# Altium PCB encoder.PcbDoc
Units mm, origin at the board's own origin, x right, y up, seen from the top; angles counter-clockwise.
Board outline 44.68 x 18.3 mm, 2 copper layers (Top Layer, Bottom Layer); 2 components, 4 nets, 12 pads, 24 vias.
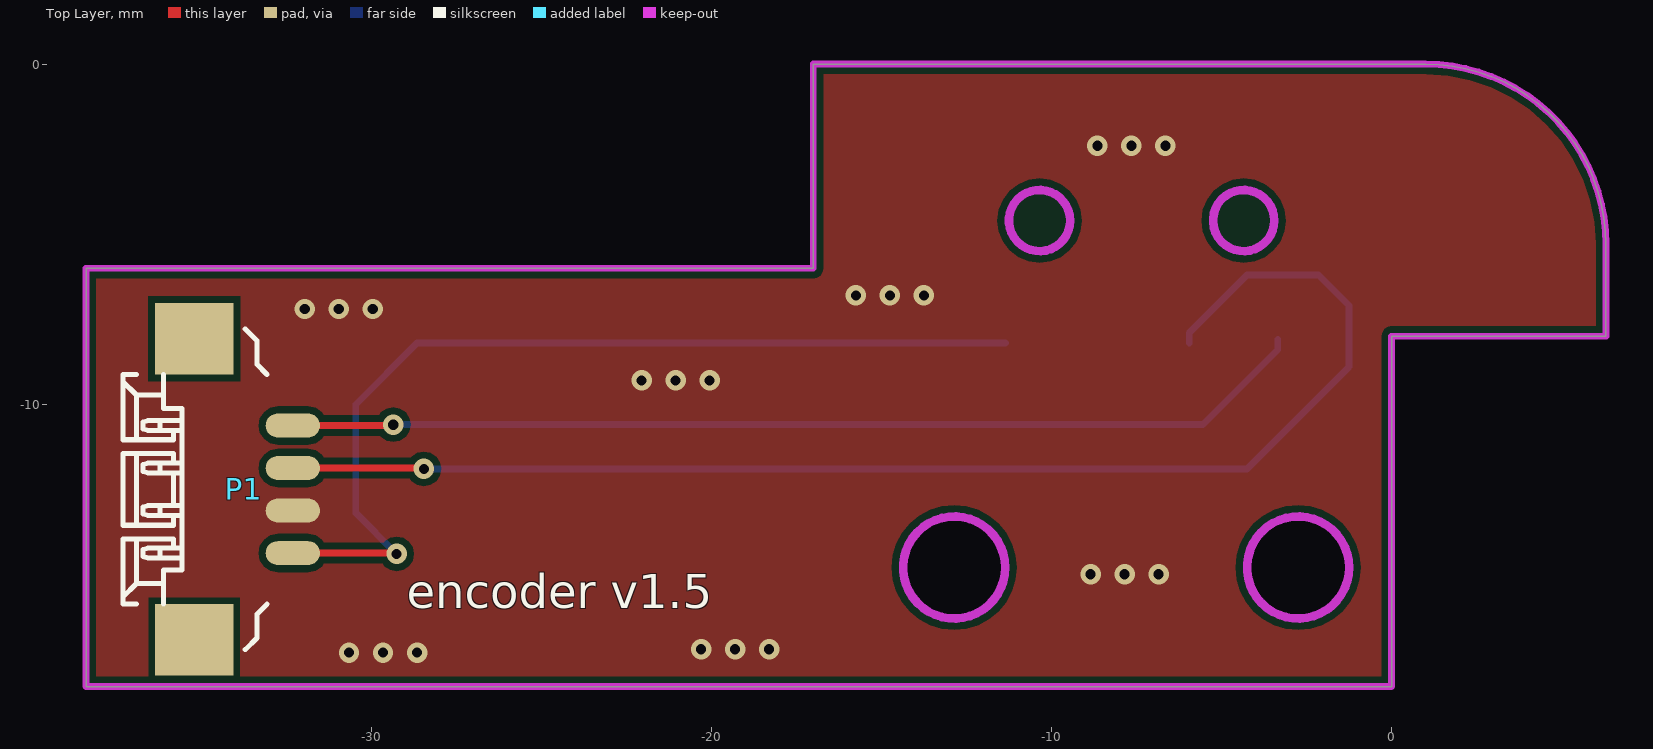
[diagram p0: Top Layer view]
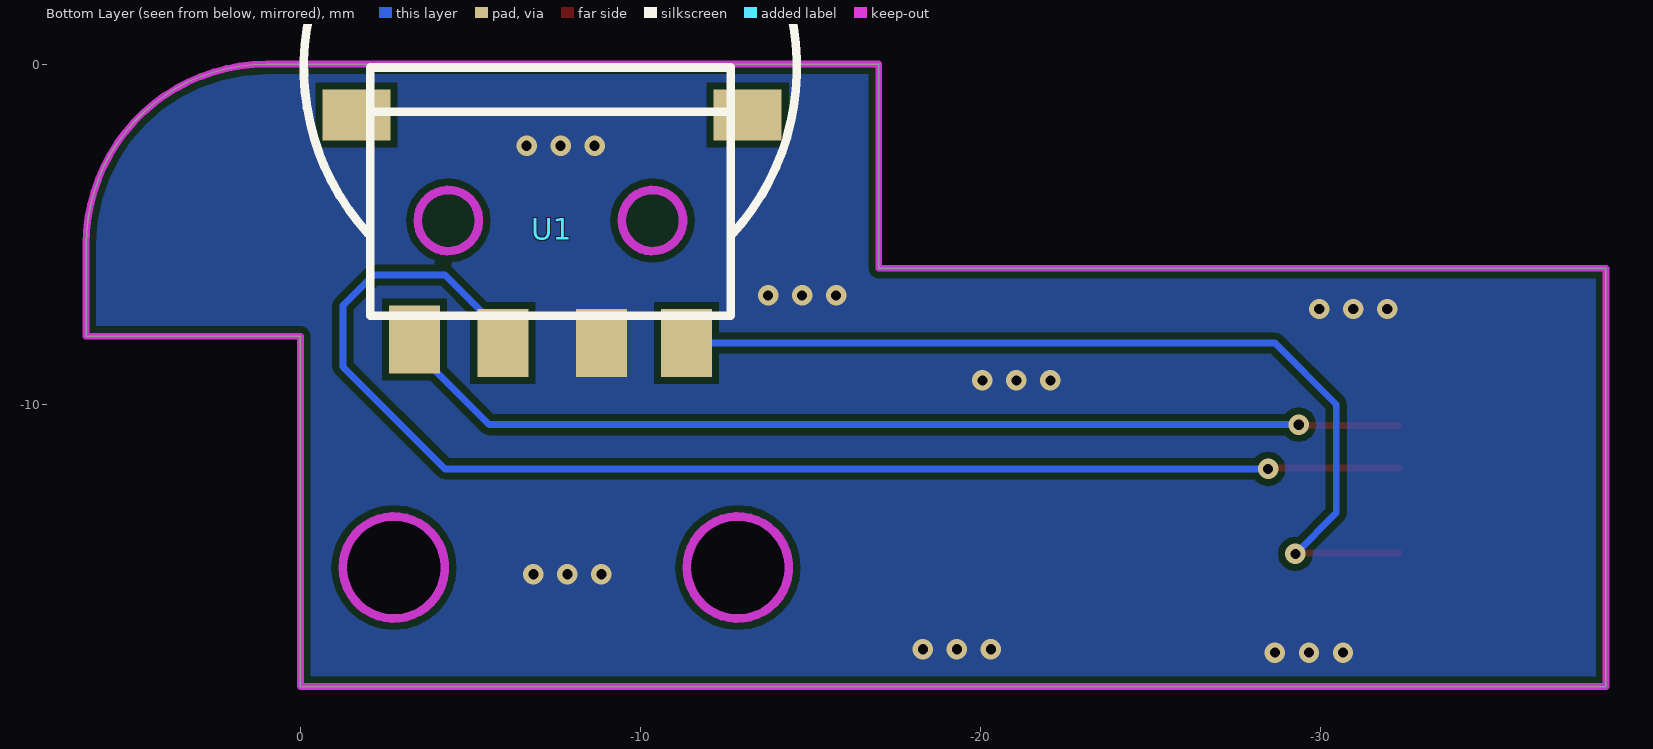
[diagram p1: Bottom Layer view, seen from below]

## Layer stack, top to bottom
Top Layer: signal copper 0.0356
Dielectric: dielectric 0.32, FR-4, Dk 4.8
Bottom Layer: signal copper 0.0356

## Board outline
-38.38,-18.3 -38.38,-6 -17,-6 -17,0 1,0 cw(c1,-5.3) 6.3,-5.3 6.3,-8 0,-8 0,-18.3
cut-out: -14.36,-14.8 ccw(c-12.86,-14.8) -12.86,-16.3 ccw(c-12.86,-14.8) -11.36,-14.8 ccw(c-12.86,-14.8) -12.86,-13.3 ccw(c-12.86,-14.8)
cut-out: -4.25,-14.8 ccw(c-2.75,-14.8) -2.75,-16.3 ccw(c-2.75,-14.8) -1.25,-14.8 ccw(c-2.75,-14.8) -2.75,-13.3 ccw(c-2.75,-14.8)

## Design rules (kind name [scope] priority, off if disabled: settings)
Clearance [All] p1: gap=0.2
ComponentClearance [All] p1 off: gap=0.254 collisioncheckmode=3 verticalgap=0.254 showdistances=FALSE
PolygonConnect [All] p1: connectstyle=Direct reliefconductorwidth=0.254 reliefentries=4 polygonreliefangle="90 Angle"
RoutingVias [All] p1: holewidth=0.3 width=0.6 viastyle="Through Hole" minholewidth=0.3 minwidth=0.6 maxholewidth=0.3 maxwidth=0.6
SilkscreenOverComponentPads [All] p1: minsilkscreentomaskgap=0.254
SolderMaskExpansion [All] p1: expansion=0.102
Width [All] p1: maxlimit=3 minlimit=0.2 preferedwidth=0.2
26 further rules are at their usual default settings.

## Components (designator, comment, footprint, x,y, rotation, side; value= is the part's Value field where it differs from the comment)
P1 "" "MX1.25-4P 卧" -33.75,-12.5 r90 top
U1 "SIQ-02FVS3滚轮编码器" 美上美SIQ-02FVS3滚轮编码器 -7.35,-0.1 r180 bottom

## Footprints (in the part's own frame and the unit in brackets; to place one, negate y for a bottom-side part, rotate by r counter-clockwise, add the part's x,y. Pads: shape width x height; smd on the part's side, far side on the other; paste and mask are expansions set on the pad)
"MX1.25-4P 卧" [mm]
  rect 2.1x2.3 smd: 0(-4.425,1.45) 0(4.425,1.45)
  oval 0.7x1.6 smd: 1(1.875,-1.45) 2(0.625,-1.45) 3(-0.625,-1.45) 4(-1.875,-1.45)
  silkscreen extent -4.71,-0.69 4.71,3.55
美上美SIQ-02FVS3滚轮编码器 [mm]
  rect 2x1.5 smd: 0(-5.7,-1.4) 0(5.8,-1.4)
  rect 1.5x2 smd: 1(-4,-8) 2(-1.4,-8.1) 3(1.5,-8.1) 4(4,-8.1)
  Keep-Out Layer circle w0.254: c3,-4.5 r0.9
  Keep-Out Layer circle w0.254: c-3,-4.5 r0.9
  silkscreen extent -7.25,-7.3 7.25,7.25

## Part data
P1: library part "Header 4", "Header, 4-Pin"

## Via types
v1: diameter 0.6, hole 0.3, Top Layer to Bottom Layer, tented both sides, 24 vias

## Nets (pads, with @x,y where several pads share a name; then routed paths per layer and width w, separated by ;. In a path a pad name is that pad's centre, name@x,y a point inside that pad or via, vN(x,y) a via of type N, cw(c..) or ccw(c..) an arc to the next point about the centre after c; other vN are vias at no path point)
GND: P1.3 U1.3
  other v1: -30.65,-17.3 -29.65,-17.3 -28.65,-17.3 -20.3,-17.2 -19.3,-17.2 -18.3,-17.2 -8.85,-15 -7.85,-15 -6.85,-15 -22.05,-9.3 -21.05,-9.3 -20.05,-9.3 -31.95,-7.2 -30.95,-7.2 -29.95,-7.2 -15.75,-6.8 -14.75,-6.8 -13.75,-6.8 -8.65,-2.4 -7.65,-2.4 -6.65,-2.4
NetP1_1: P1.1 U1.1 | length 30.2
  Top Layer w0.2: P1.1 -29.375,-10.625 v1(-29.35,-10.6)
  Bottom Layer w0.2: v1(-29.35,-10.6) -5.55,-10.6 -3.35,-8.4 U1.1
NetP1_2: P1.2 U1.2 | length 40.3
  Top Layer w0.2: P1.2 -28.425,-11.875 v1@-28.35,-11.8
  Bottom Layer w0.2: v1(-28.45,-11.9) -4.25,-11.9 -1.25,-8.9 -1.25,-7.1 -2.15,-6.2 -4.25,-6.2 -5.95,-7.9 U1.2
NetP1_4: P1.4 U1.4 | length 27.8
  Top Layer w0.2: P1.4 v1@-29.275,-14.375
  Bottom Layer w0.2: v1(-29.25,-14.4) -30.45,-13.2 -30.45,-10 -28.65,-8.2 U1.4
pads on no net: P1.0 U1.0

## Polygon pours and split planes (outlines as drawn)
GND on Bottom Layer "Top Layer-No Net" (solid, remove dead copper, pour order 1000): -45.15,10.5 9.05,10.5 11.25,8.3 8.55,5.6 8.55,-30.2 -36.85,-30.2 -42.65,-24.4
GND on Top Layer "Top Layer-No Net" (solid, remove dead copper, pour order 1001): -44.55,10.6 -43.55,9.6 9.05,9.6 9.05,-23.4 8.45,-24 6.25,-21.8 -49.75,-21.8

## Keep-outs
Keep-Out Layer:
  circle w0.254: c-12.86,-14.8 r1.5
  circle w0.254: c-2.75,-14.8 r1.5
  lines w0.2: -38.38,-18.3 0,-18.3 0,-8 1,-8 6.3,-8 6.3,-5.3 ccw(c1,-5.3) 1,0 0,0 -17,0 -17,-6 -38.38,-6 -38.38,-18.3

## Silkscreen, mask and mechanical layers (free items; w line width, h text height)
Top Overlay:
  text "encoder v1.5" at -28.95,-16 h1